# EAGLE board Utility_Micro_v346 (EAGLE 9.7.0)
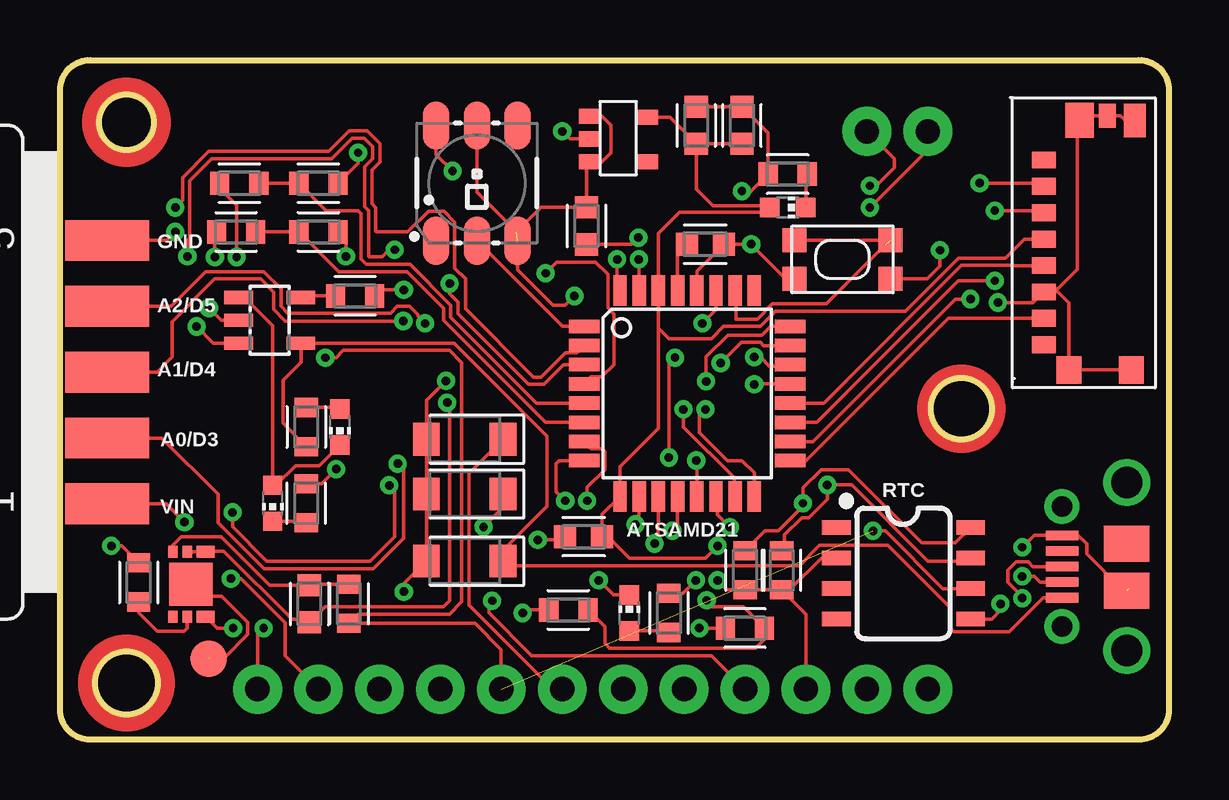
[diagram p0: board, top side]
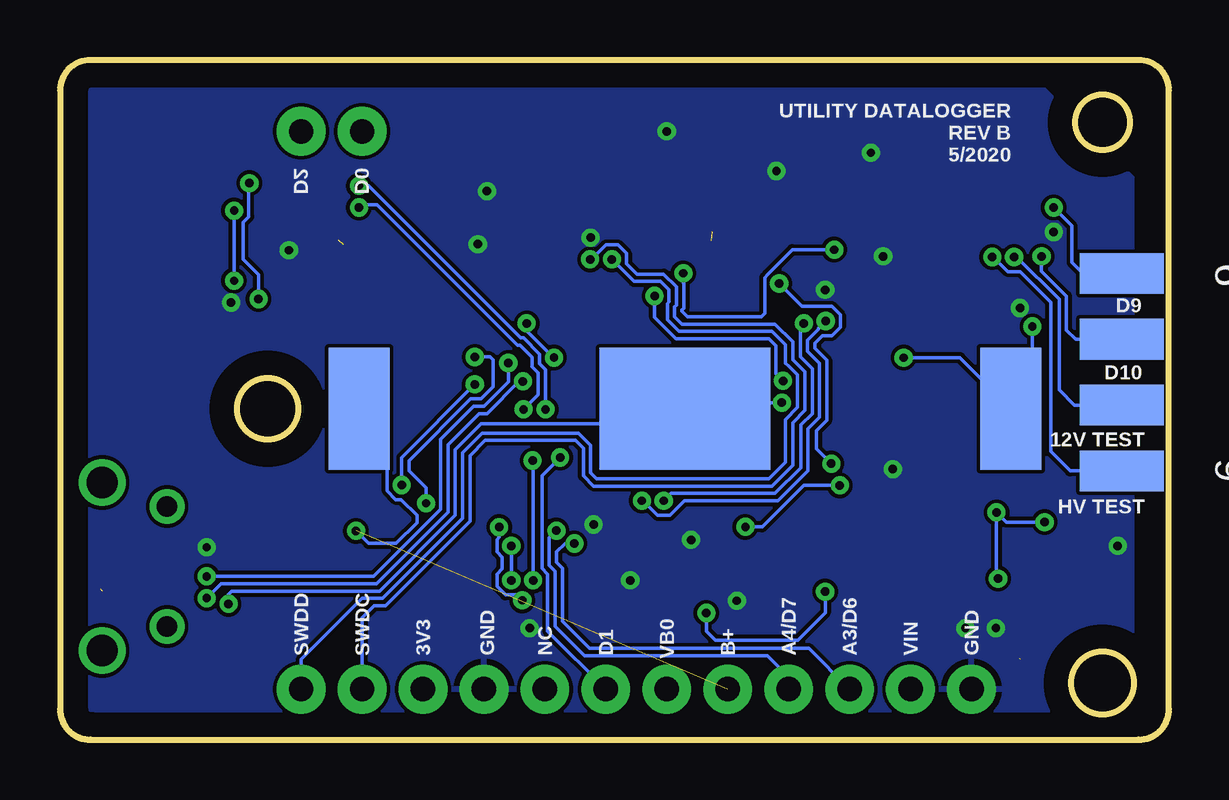
[diagram p1: board, bottom side, seen from below]

Size 46.23 x 28.32 mm. Coordinates in mm from the lower left corner, seen from the top.
Outline: 1.27,28.32 44.96,28.32 arc-90 46.23,27.05 46.23,1.27 arc-90 44.96,0 1.27,0 arc-90 0,1.27 0,27.05 arc-90 1.27,28.32
Outline: circle at 2.77,25.73 radius 1.14
Outline: circle at 2.77,2.36 radius 1.3
Outline: circle at 37.57,13.79 radius 1.27
Copper layers (1*16): Top 0.035mm / dielectric 1.5mm / Bottom 0.035mm
Design rules "default *": minimum track width 6mil, minimum drill 0.35mm, track to track 6mil, track to pad 6mil, pad to pad 6mil, via to via 6mil, smd to smd 6mil, copper to edge 40mil, drill to drill 6mil, minimum pad ring 10mil, minimum via ring 8mil, stop-mask expansion 4mil, vias tented up to drill 15mil, thermal gap 10mil

## Footprints (pad centres in the part's own frame; a part is rotated, then mirrored left to right if it is on the bottom)
TQFP32-08 = smd 1.27 x 0.559: 1 -4.293,2.8; 2 -4.293,2; 3 -4.293,1.2; 4 -4.293,0.4; 5 -4.293,-0.4; 6 -4.293,-1.2; 7 -4.293,-2; 8 -4.293,-2.8; 17 4.293,-2.8; 18 4.293,-2; 19 4.293,-1.2; 20 4.293,-0.4; 21 4.293,0.4; 22 4.293,1.2; 23 4.293,2; 24 4.293,2.8 | smd 0.559 x 1.27: 9 -2.8,-4.293; 10 -2,-4.293; 11 -1.2,-4.293; 12 -0.4,-4.293; 13 0.4,-4.293; 14 1.2,-4.293; 15 2,-4.293; 16 2.8,-4.293; 25 2.8,4.293; 26 2,4.293; 27 1.2,4.293; 28 0.4,4.293; 29 -0.4,4.293; 30 -1.2,4.293; 31 -2,4.293; 32 -2.8,4.293
CAPC1608X85 = smd 0.921 x 0.97: 1 -0.775,0; 2 0.775,0
SODFL3718X115 = smd 1.115 x 1.361: 1 -1.6,0; 2 1.6,0
SOT23-5L = smd 0.55 x 1.2: 1 -0.95,-1.3; 2 0,-1.3; 3 0.95,-1.3; 4 0.95,1.3; 5 -0.95,1.3
CHIP-LED0603 = smd 0.8 x 0.8: A 0,-0.75; C 0,0.75
RESC1608X60 = smd 0.799 x 0.974: 1 -0.815,0; 2 0.815,0
SO08 = smd 0.6 x 1.2: 1 -1.905,-2.8; 2 -0.635,-2.8; 3 0.635,-2.8; 4 1.905,-2.8; 5 1.905,2.8; 6 0.635,2.8; 7 -0.635,2.8; 8 -1.905,2.8
KMR2 = smd 1 x 1: 1 2,0.8; 2 2,-0.8; 3 -2,0.8; 4 -2,-0.8
LED-TRICOLOR-5050-IC = smd 2 x 1.1: 1 -2.4,1.7; 2 -2.4,0; 3 -2.4,-1.7; 4 2.4,-1.7; 5 2.4,0; 6 2.4,1.7
AP9221_FOOTPRINT = smd 0.4 x 0.5: NC 1.75,2.95; VDD 1.75,0.25; VM 1.15,2.95; VSS 1.15,0.25 | smd 1.8 x 1.8: P$4 1,1.6 | smd 0.75 x 0.5: S1 0.375,0.25; S2 0.375,2.95
MOLEX_MICRO_USB = smd 1.9 x 1.5: CASE_GND 2.7,0.3; GND3 2.7,2.25 | smd 1.35 x 0.4: DMIN 0,0.65; DPLUS 0,1.3; GND 0,2.6; ID 0,1.95; VBUS 0,0 | drill 0.85 pad 1.45: P$6 0,-1.2; P$7 0,3.8 | drill 1.3: P$8 2.7,-2.2; P$9 2.7,4.8
SOT-25 = smd 0.889 x 0.635: P$1 0,0; P$2 0,-0.95; P$3 0,-1.9; P$4 2.4,-1.9; P$5 2.4,-0.05
BC-2005 = smd 5.08 x 2.54: P$1 0,0; P$2 0,-27.178 | smd 5.08 x 7.112: P$3 0,-13.589
TP_SMALL_6 = drill 1.016 pad 2.032: P$1 0,0; P$2 0,2.54; P$3 0,5.08; P$4 0,7.62; P$5 0,10.16; P$6 0,12.7
MICRO_SD_SMALL = smd 1 x 0.7: CMD 0,5.5; CS 0,6.6; DAT0 0,1.1; DAT1 0,0; DAT2 0,7.7; SCLK 0,3.3; VDD 0,4.4; VSS 0,2.2 | smd 1.05 x 1.15: GND1 1.05,-1.05; GND2 3.65,-1.05 | smd 1.2 x 1.45: GND3 1.5,9.35 | smd 0.7 x 1: GND4 2.65,9.55 | smd 0.9 x 1.4: GND5 3.8,9.35
TP_2 = drill 1.016 pad 2.032: P$1 0,0; P$2 0,2.54
TP_SMALL_4 = drill 1.016 pad 2.032: P$1 0,0; P$2 0,2.54; P$3 0,5.08; P$4 0,7.62
SINGLE-SMD = smd 1.524 x 1.524: TP1 0,0
F09D = smd 1.7 x 3.5: 1 -5.486,-6.045; 2 -2.743,-6.045; 3 0,-6.045; 4 2.743,-6.045; 5 5.486,-6.045 | smd 1.7 x 3.5 bottom: 6 -4.115,-6.045; 7 -1.372,-6.045; 8 1.372,-6.045; 9 4.115,-6.045

## Placement (x,y rotation side)
ATSAMD21  ATSAMD21TQFP  [TQFP32-08]  26.14,14.43 0 top
C1  100nF  [CAPC1608X85]  28.43,25.6 270 top
C2  100nF  [CAPC1608X85]  21.82,8.46 0 top
C3  100nF  [CAPC1608X85]  10.39,5.66 90 top
C5  10uF  [CAPC1608X85]  26.52,25.6 90 top
C7  1uF  [CAPC1608X85]  26.9,20.65 180 top
C8  10uF  [CAPC1608X85]  21.95,21.41 270 top
D1  SCHOTTKY_MBR0520LT1GDO-219-AB(SOD123F)  [SODFL3718X115]  16.87,10.23 180 top
D2  SCHOTTKY_MBR0520LT1GDO-219-AB(SOD123F)  [SODFL3718X115]  16.87,12.52 180 top
D3  SCHOTTKY_MBR0520LT1GDO-219-AB(SOD123F)  [SODFL3718X115]  16.87,7.44 180 top
IC1  MCP73831/OT  [SOT23-5L]  8.74,17.47 270 top
LED1  [CHIP-LED0603]  11.66,13.03 180 top
LED2  [CHIP-LED0603]  8.87,9.85 180 top
LED3  [CHIP-LED0603]  23.73,5.28 0 top
LED8  [CHIP-LED0603]  30.33,22.17 270 top
R1  470  [RESC1608X60]  7.35,21.16 180 top
R2  100  [RESC1608X60]  10.78,21.16 180 top
R3  2.2k  [RESC1608X60]  7.47,23.19 180 top
R4  100  [RESC1608X60]  10.78,23.19 180 top
R5  12k  [RESC1608X60]  12.3,18.49 0 top
R6  470  [RESC1608X60]  10.27,13.03 90 top
R7  470  [RESC1608X60]  10.27,9.85 270 top
R8  10k  [RESC1608X60]  28.56,7.06 270 top
R9  10k  [RESC1608X60]  30.08,7.06 270 top
R10  1k  [RESC1608X60]  30.33,23.57 0 top
R11  1k  [RESC1608X60]  25.38,5.28 90 top
R12  470  [RESC1608X60]  12.05,5.66 90 top
R13  2.7k  [RESC1608X60]  3.28,6.55 90 top
R14  1M  [RESC1608X60]  28.56,4.65 0 top
R15  1M  [RESC1608X60]  21.19,5.41 180 top
RTC  DS3231M  [SO08]  35.16,6.93 270 top
SW1  SPST_TACT-KMR2  [KMR2]  32.62,20.01 0 top
U1  WS2812  [LED-TRICOLOR-5050-IC]  17.38,23.19 90 top
U$1  AP9221  [AP9221_FOOTPRINT]  6.46,8.08 180 top
U$2  MOLEX_MICRO_USB  [MOLEX_MICRO_USB]  41.76,5.92 0 top
U$3  AP2112  [SOT-25]  22.08,25.98 0 top
U$4  LIR2450H  [BC-2005]  6.58,13.79 270 bottom
U$5  TP_SMALL_6_DEVICE  [TP_SMALL_6]  26.02,2.11 90 top
U$6  SMALL_MICRO_SD  [MICRO_SD_SMALL]  41,16.46 0 top
U$7  TP_2  [TP_2]  36.18,25.35 90 top
U$8  TP_SMALL_4_DEVICE  [TP_SMALL_4]  28.56,2.11 270 top
U$9  TP_2  [TP_2]  10.78,2.11 90 top
U$10  SINGLE-SMD  [SINGLE-SMD]  6.2,3.38 0 top
X2  [F09D]  -4.08,15.31 90 top

## Library data of the parts
ATSAMD21 = ATSAMD21; CATEGORY: IC_Embedded; MANUFACTURER: Microchip; MPN: ATmega328P; OPERATING_TEMP: -40 to 85 °C; PART_STATUS: Active; SUB-CATEGORY: Microcontroller
C1-C3 C5 C7 C8 = Capacitor; CATEGORY: Capacitor
D1-D3 = Diode; CATEGORY: Diode; DESCRIPTION: DIODE SCHOTTKY 20V 500MA SOD123; MANUFACTURER: ON Semiconductor; MPN: MBR0520LT1G; SUB-CATEGORY: Schottky
IC1 LED1-LED3 LED8 SW1 = adafruit
R1-R15 = Resistor; CATEGORY: Resistor; SUB-CATEGORY: Fixed
RTC = SparkFun-Clocks; PROD_ID: IC-11985
U1 = SparkFun-LED; PROD_ID: DIO-11598
U$1 = _Battery Protection.23c4667e-8688-4a8e-ab9c-1bf2805c4cb3.flbr
U$2 = _microUSB.703a61e9-a720-4502-b905-a250d79a7013.flbr
U$3 = _Voltage Regulator.ae2405e3-5cce-43f6-aaa0-8785680cd1fb.flbr
U$4 = _CoinCellHolders.6a8b2b72-b7f1-426d-b480-d77287084b76.flbr
U$5 U$7-U$10 = Test_Points
U$6 = _Memory_Cards.85c9cb0b-4d3c-4a06-937b-9a27f087b036.flbr
X2 = con-subd; OC_FARNELL: unknown; OC_NEWARK: unknown

## Nets
3V3: ATSAMD21.9 ATSAMD21.30 C1.2 C2.2 C5.1 LED8.A R8.2 R9.2 RTC.2 U$3.P$5 U$6.VDD U$8.P$2
48_V: R3.2 X2.6
A3: ATSAMD21.11 U$5.P$6
A4: ATSAMD21.12 U$5.P$5
A5: ATSAMD21.14 R14.2 R15.1
BGU: C3.1 RTC.5 U$1.S1 U$1.VSS U$4.P$3
D0: ATSAMD21.15 U$7.P$2
D1: ATSAMD21.27 U$5.P$2
D2: ATSAMD21.16 U$7.P$1
D9: ATSAMD21.2 X2.9
D10: ATSAMD21.4 X2.8
DMIN: ATSAMD21.23 U$2.DMIN
DPLU: ATSAMD21.24 U$2.DPLUS
GND: ATSAMD21.10 ATSAMD21.28 C1.1 C2.1 C5.2 C7.1 C8.2 IC1.2 LED3.C R2.1 R4.1 R5.2 R7.1 R10.1 R13.2 R14.1 SW1.2 SW1.4 U1.6 U$1.S2 U$2.CASE_GND U$2.GND U$3.P$2 U$6.GND1 U$6.GND2 U$6.GND3 U$6.GND4 U$6.GND5 U$6.VSS U$8.P$1 U$9.P$2 X2.5
GPIO1: ATSAMD21.3 X2.2
GPIO2: ATSAMD21.7 X2.3
GPIO3: ATSAMD21.8 X2.4
GPIO8: ATSAMD21.25
MISO: ATSAMD21.17 U$6.DAT0
MOSI: ATSAMD21.19 U$6.CMD
N$1: LED3.A R11.1
N$2: U$1.P$4 U$10.TP1
N$4: C3.2 R12.2 U$1.VDD
N$5: ATSAMD21.13 R11.2
N$6: ATSAMD21.29 C7.2
N$9: R13.1 U$1.VM
N$11: R1.2 X2.7
N$13: IC1.5 R5.1
N$14: LED1.A R6.2
N$15: LED2.C R7.2
N$16: IC1.1 LED1.C LED2.A
N$17: LED8.C R10.2
REG_VIN: C8.1 D1.2 D2.2 D3.2 R15.2 U1.3 U1.5 U$3.P$1 U$3.P$3
RST: ATSAMD21.26 SW1.1 SW1.3
RTC_SCL: ATSAMD21.22 R8.1 RTC.8
RTC_SDA: ATSAMD21.21 R9.1 RTC.7
SCLK: ATSAMD21.20 U$6.SCLK
SD_CS: ATSAMD21.18 U$6.CS
SWDC: ATSAMD21.31 U$8.P$3
SWDD: ATSAMD21.32 U$8.P$4
UL1: ATSAMD21.1 U1.2
ULED_OUT: U1.1
V_12: ATSAMD21.6 R1.1 R2.2
V_48: ATSAMD21.5 R3.1 R4.2
VBAT: IC1.3 R12.1 RTC.6 U$4.P$1 U$4.P$2 U$5.P$4
VBO: D2.1 U$5.P$3
VBUS: D3.1 IC1.4 R6.1 U$2.VBUS
VCC: D1.1 U$9.P$1 X2.1

## Tracks (layer width: path | path; a pad name or v marks a point on that pad's centre or on a via)
3V3  (via drill 0.35)
  Top 0.152: U$6.VDD 40.19,20.86 39.4,20.06 37.45,20.06 35.24,17.86 29.83,17.86 29.19,17.22 27.67,17.22 27.16,16.71 25.38,16.71 24.94,17.15 ATSAMD21.30 | C5.1 25.42,25.93 U$3.P$5 | C5.1 C1.2 | ATSAMD21.30 24.94,12.97 23.34,11.37 ATSAMD21.9 22.6,9.39 C2.2 22.84,8.46 23.73,7.57 26.9,7.57 v27.41,8.08 | R9.2 R8.2 27.81,6.24 v27.41,6.64 | R9.2 30.41,6.24 31.73,7.57 RTC.2 | ATSAMD21.30 24.94,21.1 25.83,21.99 29.77,21.99 LED8.A 29.51,22.25 27.21,22.25 26.52,22.93 C5.1 | R9.2 31.1,5.23 U$8.P$2
  Bottom 0.152: v27.41,8.08 v27.41,6.64
48_V  (via drill 0.35)
  Top 0.152: v7.37,20.11 7.37,22.28 6.66,22.99 R3.2
  Bottom 0.152: X2.6 4.12,11.2 4.93,12.01 4.93,18.24 6.2,19.51 6.71,19.51 7.32,20.11 v7.37,20.11
A3  (via drill 0.35)
  Top 0.152: ATSAMD21.11 24.94,8.98 24.93,8.96 24.93,8.32 v24.79,8.17
  Bottom 0.152: v24.79,8.17 25.18,8.17 25.53,7.82 25.53,7.39 25.29,7.14 25.29,4.93 24.16,3.81 15.02,3.81 U$5.P$6
A4  (via drill 0.35)
  Top 0.152: ATSAMD21.12 25.74,8.92 v25.54,8.71
  Bottom 0.152: v25.54,8.71 25.84,8.41 25.84,7.26 25.59,7.02 25.59,4.73 24.36,3.5 16.74,3.5 15.86,2.61 U$5.P$5
A5  (via drill 0.35)
  Top 0.152: ATSAMD21.14 27.41,10.06 27.41,9.37 v27.92,8.86 | R15.1 22.71,4.7 22.71,4.01 22.92,3.81 28.99,3.81 29.37,4.19 R14.2 28.48,5.54 27.03,5.54 26.9,5.66 26.9,5.76 v26.96,5.81
  Bottom 0.152: v26.96,5.81 27.18,6.03 27.66,6.03 28.02,6.39 28.02,6.89 27.79,7.12 27.79,7.6 28.02,7.82 28.02,8.33 27.92,8.43 v27.92,8.86
BGU  (via drill 0.35)
  Top 0.152: U$1.S1 6.12,7.86 6.83,7.86 9.68,5.01 10.27,5.01 C3.1 11.04,5.54 15.98,5.54 16.24,5.79 16.24,13.95 v16.14,14.04 | U$1.VSS U$1.S1 | U$1.S1 | RTC.5 38.84,5.03 39.2,5.39 v39.2,5.66
  Bottom 0.152: v16.14,14.04 19.92,14.04 U$4.P$3 20.81,13.16 28.68,13.16 29.75,12.09 29.75,9.35 32.91,6.2 39.07,6.2 39.22,6.04 39.2,6.02 v39.2,5.66
D0  (via drill 0.35)
  Top 0.152: ATSAMD21.15 28.1,10.17 28.1,10.91 25.99,13.03 v25.99,13.76 | v33.76,23.08 34.04,23.08 34.78,23.82 34.78,24.2 U$7.P$2
  Bottom 0.152: v25.99,13.76 25.99,15.42 26.24,15.67 26.24,16.07 26.91,16.74 27.03,16.74 33.37,23.08 v33.76,23.08
D1  (via drill 0.35)
  Top 0.152: ATSAMD21.27 27.34,17.91 v26.78,17.35 | v25.63,15.92 25.38,15.67 v25.38,11.76
  Bottom 0.152: v26.78,17.35 26.78,17.03 25.65,15.91 v25.63,15.92 | v25.38,11.76 26.14,11 26.14,7.14 25.9,6.89 25.9,4.53 U$5.P$2
D2  (via drill 0.35)
  Top 0.152: ATSAMD21.16 28.94,11.12 28.43,11.63 27.81,11.63 26.66,12.78 26.66,13.52 v26.9,13.76 | v33.76,22.17 36.18,24.59 U$7.P$1
  Bottom 0.152: v26.9,13.76 26.29,14.37 26.29,15.29 26.55,15.54 26.55,15.94 27.04,16.43 27.16,16.43 33.02,22.3 33.64,22.3 v33.76,22.17
D9  (via drill 0.35)
  Top 0.152: ATSAMD21.2 21.56,16.13 21.07,16.13 20.05,15.11 19.74,15.11 16.9,17.96 16.9,19.21 16.46,19.65 16.46,21.56 16,22.02 15.36,22.02 14.5,21.16 13.19,21.16 13.16,21.18 13.16,22.17 13.01,22.32 13.01,23.75 13.34,24.07 13.34,24.84 12.8,25.37 12.05,25.37 11.19,24.51 6.2,24.51 5.11,23.41 5.11,22.47 v4.81,22.17
  Bottom 0.152: v4.81,22.17 4.04,21.41 4.04,19.89 3.59,19.43 X2.9
D10  (via drill 0.35)
  Top 0.152: ATSAMD21.4 22.14,15.12 22.58,15.12 23.09,15.63 23.09,17.73 22.83,17.99 22.83,19.38 22.33,19.89 20.69,19.89 v20.24,19.44 | v13.95,20.42 13.72,20.42 13.42,20.12 12.88,20.12 12.86,20.14 12.86,22.04 12.71,22.2 12.71,23.87 13.03,24.2 13.03,24.71 12.68,25.07 12.18,25.07 11.31,24.2 6.33,24.2 5.41,23.29 5.41,20.91 5.31,20.81 v5.31,20.14
  Bottom 0.152: v20.24,19.44 20.24,19.01 20.23,18.99 20.23,17.99 20.3,17.91 20.3,17.85 20.07,17.63 17,17.63 16.85,17.77 16.85,19.26 16.74,19.37 16.74,19.38 15.71,20.42 v13.95,20.42 | v5.31,20.14 5.31,19.52 4.27,18.48 4.27,17.07 3.89,16.69 X2.8
DMIN  (via drill 0.35)
  Top 0.152: ATSAMD21.23 29.32,16.43 29.19,16.56 28.4,16.56 v27.54,15.7 | v40.11,6.81 40.62,6.81 40.87,6.55 41.75,6.55 U$2.DMIN
  Bottom 0.152: v27.54,15.7 27.54,14.91 28.56,13.89 28.99,13.89 30.36,12.52 30.36,9.6 33.16,6.81 v40.11,6.81
DPLU  (via drill 0.35)
  Top 0.152: ATSAMD21.24 29.63,17.23 29.26,16.86 27.85,16.86 26.93,15.95 v26.93,14.93 | U$2.DPLUS 40.56,7.22 40.36,7.41 39.86,7.41 39.51,7.06 39.51,6.55 40.11,5.95 v40.11,5.9
  Bottom 0.152: v26.93,14.93 27.09,14.93 28.43,13.59 28.76,13.59 30.06,12.29 30.06,9.48 33.03,6.5 39.51,6.5 v40.11,5.9
GND  (via drill 0.35)  (1 unrouted)
  Top 0.152: U$2.GND 41.73,8.55 | 44.56,6.3 44.24,6.3 42.79,7.74 42.79,8.16 42.41,8.55 41.8,8.55 U$2.GND | ATSAMD21.28 26.54,19.51 C7.1 v28.81,20.65 30.24,19.21 SW1.4 | 11.59,21.43 R2.1 11.92,20.83 v11.92,20.14 | U$2.GND 40.61,8.52 v40.11,8.02 | C5.2 C1.1 29.52,25.29 R10.1 28.81,22.86 v28.43,22.86 | U1.6 15.68,24.38 v16.36,23.7 | R4.1 12.43,24.02 v12.43,24.46 | ATSAMD21.10 24.14,9.38 23.98,9.22 v23.98,8.96 | LED3.C 23.07,6.03 v22.46,6.64 | SW1.2 36.16,19.21 36.68,19.73 v36.68,20.39 | U$8.P$1 27.16,3.5 19.67,3.5 17.89,5.28 17.89,5.66 v18.01,5.79 | R5.2 13.37,18.74 v14.33,18.74 | R13.2 2.57,8.08 v2.14,8.08 | U$1.S2 6.56,4.65 v7.22,4.65 | R7.1 10.91,10.67 v11.52,11.27 | U$3.P$2 21.25,25.03 v20.94,25.35 | C8.2 23.82,20.64 v24.11,20.92 | IC1.2 6.73,17.47 v6.21,17.99 | X2.5 4.45,20.8 v4.81,21.16 | C2.1 20.92,8.33 v19.92,8.33 | U$9.P$2 8.24,4.39 v8.49,4.65 | R14.1 v26.65,4.65 | U$6.VSS 41.6,18.66 42.05,18.2 U$6.GND1 U$6.GND2 | U$6.VSS 41.14,18.8 41.6,18.8 42.4,19.6 42.4,25.7 U$6.GND3 42.7,26.01 U$6.GND4 44.2,26.01 44.38,25.83 44.78,25.83 U$6.GND5 | U$6.VSS 40.56,18.22 v39.1,18.22
  pour Bottom: 1.5,23.44 5.31,27.25 45.19,27.25 45.19,1.09 4.3,1.09 1.5,3.88
GPIO1  (via drill 0.35)
  Top 0.152: ATSAMD21.3 20.99,15.63 20.17,14.81 19.54,14.81 16.59,17.75 16.59,18.23 16.25,18.58 v16.25,19.01 | v14.08,11.5 14.33,11.25 14.33,8.4 13.06,7.13 8.5,7.13 6.58,9.05 6.58,10.23 4.25,12.57 X2.2
  Bottom 0.152: v16.25,19.01 15.29,18.05 14.06,18.05 13.7,17.7 13.7,17.19 14.06,16.84 14.44,16.84 14.76,16.51 14.76,16.3 14.26,15.8 14.26,13.3 14.69,12.88 14.69,12.11 v14.08,11.5
GPIO2  (via drill 0.35)
  Top 0.152: ATSAMD21.7 22.14,12.13 22.58,12.13 22.71,12 22.71,11.25 21.97,10.51 v21.97,9.96 | v14.31,17.45 9.39,17.45 8.91,17.93 8.91,18.65 8.36,19.2 6.46,19.2 4.68,17.42 4.68,15.95 4.04,15.31 X2.3
  Bottom 0.152: v21.97,9.96 21.92,9.96 21.31,9.35 20.81,9.35 20.21,9.96 16.3,9.96 15.04,11.21 15.04,12.95 14.57,13.43 14.57,15.68 15.07,16.18 15.07,16.64 14.61,17.1 14.61,17.14 v14.31,17.45
GPIO3  (via drill 0.35)
  Top 0.152: ATSAMD21.8 20.8,11.63 20.68,11.5 20.68,10.34 v21.06,9.96 | v15.22,17.35 14.92,17.65 14.92,17.7 14.56,18.05 14.06,18.05 13.78,17.77 9.5,17.77 9.21,18.05 9.21,18.78 8.49,19.51 6.08,19.51 4.63,18.06 X2.4
  Bottom 0.152: v21.06,9.96 20.76,10.26 16.42,10.26 15.35,11.34 15.35,13.11 14.87,13.59 14.87,15.46 15.37,15.96 15.37,17.19 v15.22,17.35
MISO
  Top 0.152: U$6.DAT0 37.02,17.56 31.09,11.63 ATSAMD21.17
MOSI  (via drill 0.35)
  Top 0.152: ATSAMD21.19 31.55,13.23 37.45,19.12 v38.97,19.12 | v38.97,22.05 40.91,22.05 U$6.CMD
  Bottom 0.152: v38.97,19.12 v38.97,22.05
N$1
  Top 0.152: LED3.A 25.32,4.53 R11.1
N$2  (1 unrouted)
  Top 0.152: U$1.P$4 5.46,5.99 6.74,5.99 7.83,4.9 7.83,4.4 6.84,3.4 6.23,3.4
N$4
  Top 0.152: R12.2 10.44,6.48 C3.2 8.73,6.44 6.71,8.46 5.06,8.46 4.71,8.1 U$1.VDD
N$5  (via drill 0.35)
  Top 0.152: R11.2 25.96,6.1 v26.5,6.64 | v26.52,11.63 26.54,11.61 ATSAMD21.13
  Bottom 0.152: v26.5,6.64 26.5,11.61 v26.52,11.63
N$6
  Top 0.152: ATSAMD21.29 25.74,20.26 C7.2
N$9
  Top 0.152: R13.1 3.28,5.28 4.04,4.52 5.19,4.52 5.31,4.64 U$1.VM
N$11  (via drill 0.35)
  Top 0.152: v6.46,20.11 6.46,21.08 R1.2
  Bottom 0.152: X2.7 3.94,13.94 4.58,14.58 4.58,18.36 6.33,20.11 v6.46,20.11
N$13
  Top 0.152: IC1.5 10.11,18.49 R5.1
N$14
  Top 0.152: R6.2 11.6,13.84 LED1.A
N$15
  Top 0.152: LED2.C 10.2,9.1 R7.2
N$16
  Top 0.152: IC1.1 7.51,18.49 7.63,18.49 8.87,17.24 LED2.A 8.99,10.6 9.81,11.42 10.81,11.42 LED1.C
N$17
  Top 0.152: LED8.C 31.08,23.5 R10.2
REG_VIN  (via drill 0.35)  (1 unrouted)
  Top 0.152: U$3.P$1 22.59,25.98 22.97,25.6 22.97,24.46 22.59,24.08 U$3.P$3 21.95,23.96 C8.1 20.06,22.19 19.08,21.21 U1.3 19.08,19.58 20.55,18.11 21.06,18.11 v21.44,18.49 | v16.09,14.95 15.27,14.14 D2.2 D1.2 D3.2 14.33,6.5 v14.33,6.17 | U1.5 17.38,22.81 19.03,21.16 | v19.28,5.28 19.41,5.41 R15.2
  Bottom 0.152: v16.09,14.95 16.39,15.26 16.39,16.43 16.68,16.71 20.55,16.71 21.44,17.6 v21.44,18.49 | v14.33,6.17 14.33,5.28 15.47,4.14 18.9,4.14 19.28,4.52 v19.28,5.28
RST  (1 unrouted)
  Top 0.152: SW1.3 SW1.1 | ATSAMD21.26 28.17,18.69 28.17,17.52 29.07,17.52 29.71,18.17 31.94,18.17 34.4,20.62
RTC_SCL  (via drill 0.35)
  Top 0.152: RTC.8 37.32,8.2 35.92,8.2 32.87,11.25 31.73,11.25 30.97,10.49 v30.97,9.85 30.97,9.73 29.95,8.71 29.39,8.71 R8.1 | v28.94,15.95 29.19,15.95 29.57,15.57 30.38,15.57 ATSAMD21.22
  Bottom 0.152: v30.97,9.85 30.97,10.49 31.68,11.2 31.68,11.63 29.11,14.2 28.69,14.2 28.17,14.71 28.17,15.82 28.3,15.95 v28.94,15.95
RTC_SDA  (via drill 0.35)
  Top 0.152: ATSAMD21.21 28.96,14.83 v28.94,14.81 | RTC.7 37.83,7.44 36.18,7.44 33,10.62 v31.98,10.62 31.98,10.01 31.22,9.25 30.92,9.25 30.21,8.53 30.21,8 R9.1
  Bottom 0.152: v28.94,14.81 31.98,11.76 v31.98,10.62
SCLK
  Top 0.152: U$6.SCLK 39.73,19.76 37.57,19.76 31.84,14.03 ATSAMD21.20
SD_CS  (via drill 0.35)
  Top 0.152: ATSAMD21.18 31.38,12.43 37.32,18.36 v37.95,18.36 | v38.33,23.19 40.87,23.19 U$6.CS
  Bottom 0.152: v37.95,18.36 37.95,19.38 38.59,20.01 38.59,21.57 38.36,21.79 38.36,23.16 v38.33,23.19
SWDC  (via drill 0.35)
  Top 0.152: ATSAMD21.31 24.13,18.73 v24.13,20.01
  Bottom 0.152: v24.13,20.01 24.08,20.01 23.47,20.62 22.97,20.62 22.61,20.26 22.61,19.84 22.18,19.4 21.07,19.4 20.53,18.87 20.53,18.11 20.61,18.04 20.61,17.62 20.3,17.32 16.42,17.32 15.68,16.58 15.68,15.83 15.18,15.33 15.18,13.72 15.68,13.22 15.68,11.44 16.55,10.56 23.98,10.56 24.42,11 24.42,12.14 24.75,12.47 28.51,12.47 29.14,11.83 29.14,9.1 32.65,5.59 33.13,5.59 33.64,5.08 U$8.P$3
SWDD  (via drill 0.35)
  Top 0.152: ATSAMD21.32 23.22,18.84 v23.22,20.01
  Bottom 0.152: v23.22,20.01 22.3,19.1 21.19,19.1 20.84,18.74 20.84,18.24 20.91,18.16 20.91,17.5 20.43,17.02 16.55,17.02 15.98,16.45 15.98,15.7 15.85,15.56 15.84,15.56 15.48,15.2 15.48,13.84 15.98,13.34 15.98,11.56 16.68,10.87 23.86,10.87 24.11,11.12 24.11,12.27 24.62,12.77 28.63,12.77 29.45,11.96 29.45,9.22 32.78,5.89 33.64,5.89 36.18,3.35 U$8.P$4
UL1
  Top 0.152: ATSAMD21.1 20.94,17.23 U1.2
V_12
  Top 0.152: R1.1 R2.2 11.61,19.51 14.46,19.51 15.98,17.98 15.98,17.47 20.23,13.23 ATSAMD21.6
V_48
  Top 0.152: R3.1 R4.2 11.1,22.05 12.43,22.05 12.55,21.92 12.55,20.01 12.76,19.81 14.58,19.81 16.29,18.11 16.29,17.6 19.86,14.03 ATSAMD21.5
VBAT  (via drill 0.35)  (1 unrouted)
  Top 0.152: v11.06,15.92 11.5,15.92 11.81,16.22 16.24,16.22 16.74,15.71 16.74,5.74 16.24,5.23 12.43,5.23 R12.1 17.31,4.85 18.4,3.76 U$5.P$4 | RTC.6 36.81,6.3 34.4,8.71 33.9,8.71 v33.89,8.7 | IC1.3 6.39,16.52 v5.7,17.22
  Bottom 0.152: U$4.P$1 6.65,13.85 | 6.65,13.85 8.71,15.92 v11.06,15.92 | v33.89,8.7 33.37,8.18 32.22,8.18 31.35,9.05 31.35,9.35 32.01,10.01 32.24,10.01 32.59,10.36 32.59,11.86 32.62,11.89 | 32.62,11.89 32.75,12.01 | U$4.P$2 32.62,12.65 32.62,11.89 | 6.65,13.85 5.7,14.81 v5.7,17.22
VBO
  Top 0.152: D2.1 17.05,11.1 17.05,5.61 20.55,2.11 U$5.P$3
VBUS
  Top 0.152: U$2.VBUS 40.99,5.92 39.57,4.5 37.26,4.5 37.13,4.63 37.13,5.47 34.5,8.1 31.66,8.1 30.82,7.25 18.67,7.25 D3.1 18.47,7.9 20.3,9.73 20.3,12.65 16.42,16.52 IC1.4 10.04,15.72 9.3,14.97 9.3,13.18 R6.1
VCC  (via drill 0.35)
  Top 0.152: X2.1 4.42,9.83 v5.19,9.06 | v7.19,9.47 7.19,8.87 8.62,7.44 12.94,7.44 13.95,8.46 13.95,10.37 v13.72,10.6 | v17.66,8.87 18.47,9.68 D1.1 | v7.12,6.71 7.55,6.71 9.38,4.88 9.38,3.5 U$9.P$1
  Bottom 0.152: v5.19,9.06 6.78,9.06 v7.19,9.47 7.19,6.78 v7.12,6.71 | v13.72,10.6 15.22,10.6 16.95,8.87 v17.66,8.87
(copper drawn outside any net)
  shapes: Top circle x3

## Text on the board
tPlace: GND | A2/D5 | A1/D4 | A0/D3 | VIN | ATSAMD21
bPlace: UTILITY DATALOGGER / REV B / 5/2020 | D0 | D2 | D9 | D10 | 12V TEST | HV TEST | GND | VIN | A3/D6 | A4/D7 | B+ | VB0 | D1 | NC | GND | 3V3 | SWDC | SWDD | VIN